# EAGLE board dac single ended 32-2 (EAGLE 4.13)
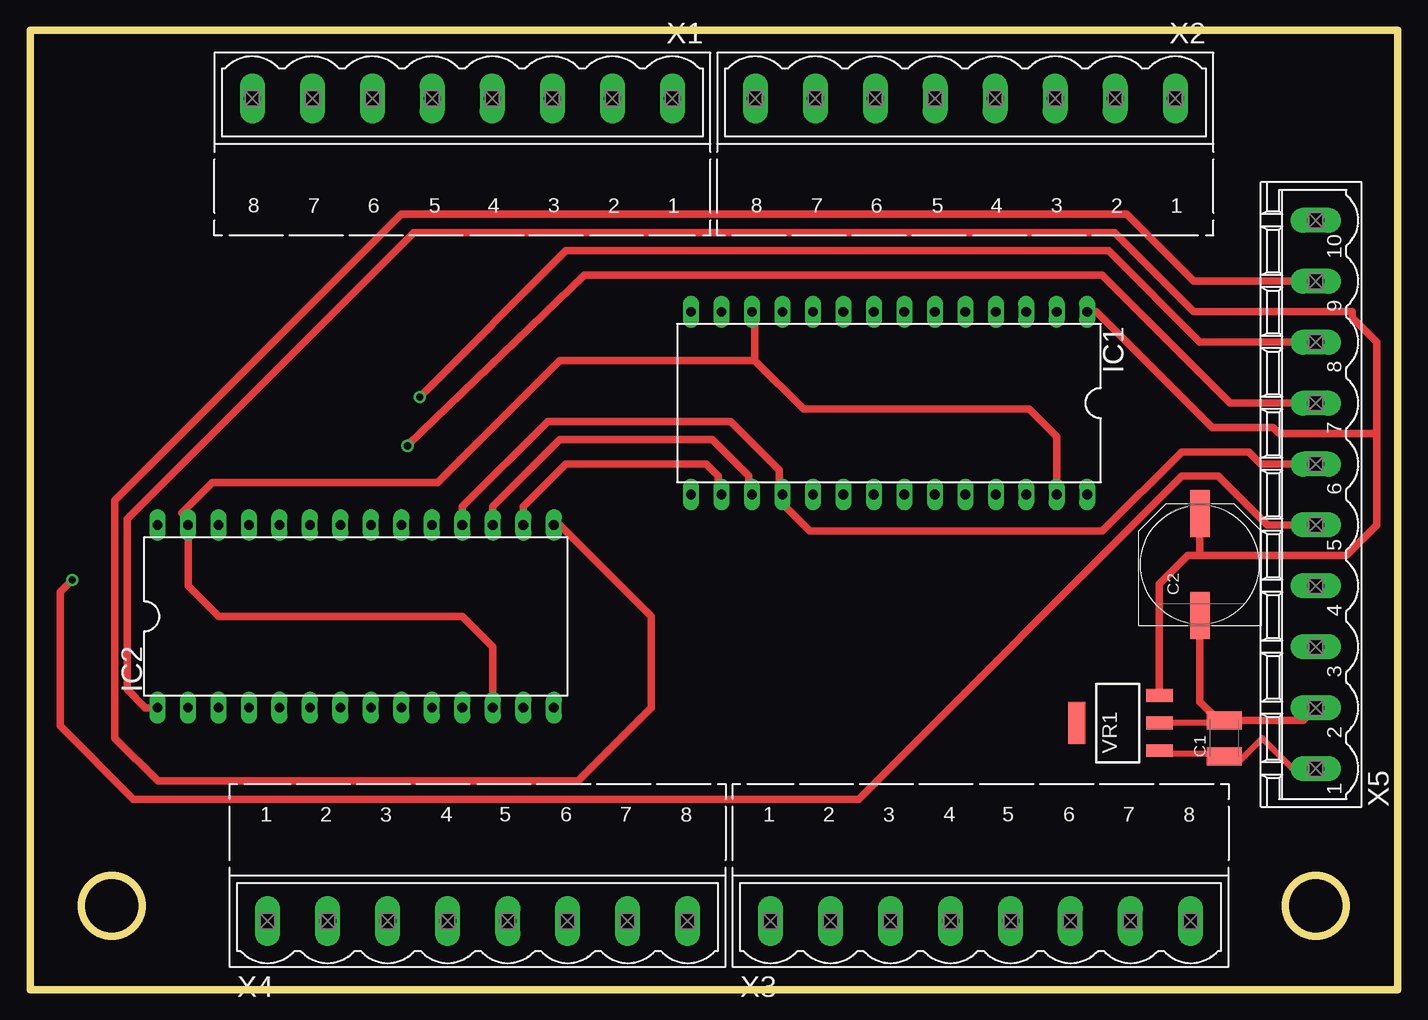
[diagram p0: board, top side]
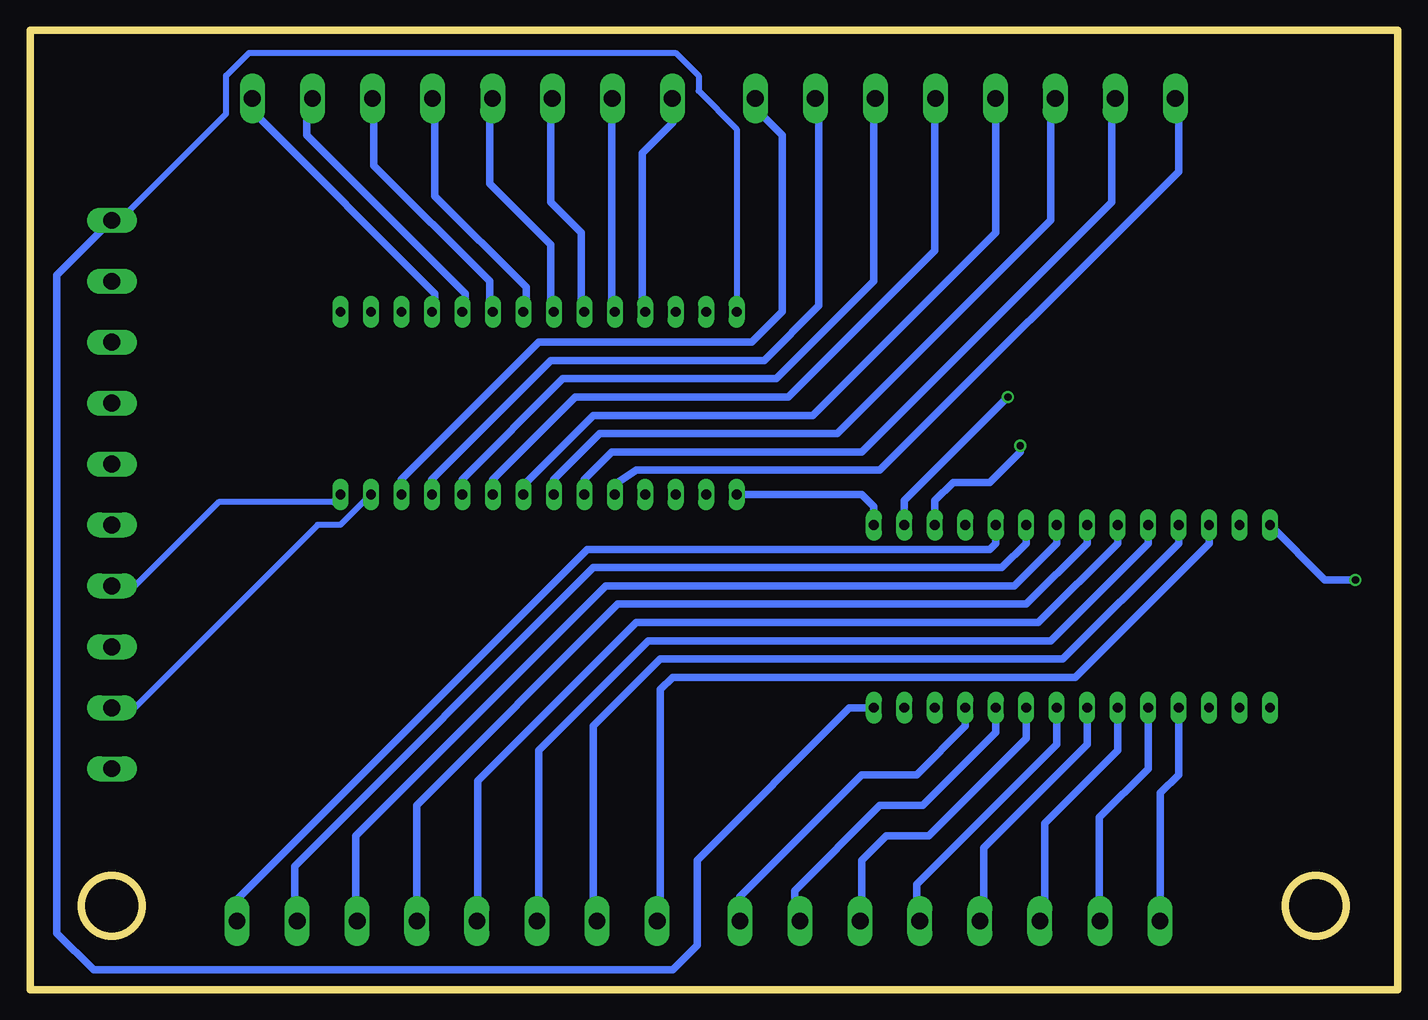
[diagram p1: board, bottom side, seen from below]

Size 113.97 x 80 mm. Coordinates in mm from the lower left corner, seen from the top.
Outline: 0,0 113.97,0 113.97,80 0,80 0,0
Outline: circle at 6.82,6.98 radius 2.54
Outline: circle at 107.15,6.98 radius 2.54
Copper layers (1*16): Top 0.035mm / dielectric 1.5mm / Bottom 0.035mm
Design rules "default": minimum track width 20mil, minimum drill 24mil, track to track 15mil, track to pad 15mil, pad to pad 15mil, via to via 15mil, smd to smd 8mil, copper to edge 40mil, drill to drill 8mil, minimum pad ring 10mil, minimum via ring 8mil, stop-mask expansion 4mil, vias tented up to drill 0mil, thermal gap 10mil

## Footprints (pad centres in the part's own frame; a part is rotated, then mirrored left to right if it is on the bottom)
C1210K = smd 1.5 x 2.9: 1 -1.5,0; 2 1.5,0
PANASONIC_G = smd 3.9 x 1.6: + 4.25,0; - -4.25,0
DIL28-6 = drill 0.813 long: 1 -16.51,-7.62; 2 -13.97,-7.62; 3 -11.43,-7.62; 4 -8.89,-7.62; 5 -6.35,-7.62; 6 -3.81,-7.62; 7 -1.27,-7.62; 8 1.27,-7.62; 9 3.81,-7.62; 10 6.35,-7.62; 11 8.89,-7.62; 12 11.43,-7.62; 13 13.97,-7.62; 14 16.51,-7.62; 15 16.51,7.62; 16 13.97,7.62; 17 11.43,7.62; 18 8.89,7.62; 19 6.35,7.62; 20 3.81,7.62; 21 1.27,7.62; 22 -1.27,7.62; 23 -3.81,7.62; 24 -6.35,7.62; 25 -8.89,7.62; 26 -11.43,7.62; 27 -13.97,7.62; 28 -16.51,7.62
SOT223R_INFINEON = smd 1.067 x 2.184: 1 -2.311,-3.479; 2 0,-3.48; 3 2.312,-3.48 | smd 3.5 x 1.4: 4 0,3.404
MSTBV8 = drill 1.397 long: 1 -17.501,0; 2 -12.497,0; 3 -7.493,0; 4 -2.489,0; 5 2.515,0; 6 7.493,0; 7 12.497,0; 8 17.501,0
MSTBV10 = drill 1.397 long: 1 -22.86,0; 2 -17.78,0; 3 -12.7,0; 4 -7.62,0; 5 -2.54,0; 6 2.54,0; 7 7.62,0; 8 12.7,0; 9 17.78,0; 10 22.86,0

## Placement (x,y rotation side)
C1  [C1210K]  99.53,20.95 90 top
C2  [PANASONIC_G]  97.5,35.43 90 top
IC1  DG406DJ  [DIL28-6]  71.59,48.89 180 top
IC2  DG406DJ  [DIL28-6]  27.14,31.11 0 top
VR1  VOLTAGE-REGULATORSO-223  [SOT223R_INFINEON]  90.64,22.22 90 top
X1  [MSTBV8]  36.03,74.29 180 top
X2  [MSTBV8]  77.94,74.29 180 top
X3  [MSTBV8]  79.21,5.71 0 top
X4  [MSTBV8]  37.3,5.71 0 top
X5  MSTBV10  [MSTBV10]  107.15,41.27 90 top

## Library data of the parts
C1 C2 VR1 = 1 Dan's Common Parts
IC1 IC2 = maxim
X1-X4 = con-phoenix-500
X5 = con-phoenix-508

## Nets
+5V: C2.+ IC1.1 IC2.1 VR1.3
+12V: C1.1 VR1.1 X5.1
GND: C1.2 C2.- IC1.12 IC1.27 IC2.12 IC2.27 VR1.2 X5.2
N$1: IC1.19 X1.8
N$2: IC1.20 X1.7
N$3: IC1.21 X1.6
N$4: IC1.22 X1.5
N$5: IC1.23 X1.4
N$6: IC1.24 X1.3
N$7: IC1.25 X1.2
N$8: IC1.26 X1.1
N$9: IC1.11 X2.8
N$10: IC1.10 X2.7
N$11: IC1.9 X2.6
N$12: IC1.8 X2.5
N$13: IC1.7 X2.4
N$14: IC1.6 X2.3
N$15: IC1.5 X2.2
N$16: IC1.4 X2.1
N$17: IC2.19 X3.8
N$18: IC2.20 X3.7
N$19: IC2.21 X3.6
N$20: IC2.22 X3.5
N$21: IC2.23 X3.4
N$22: IC2.24 X3.3
N$23: IC2.25 X3.2
N$24: IC2.26 X3.1
N$25: IC2.11 X4.8
N$26: IC2.10 X4.7
N$27: IC2.9 X4.6
N$28: IC2.8 X4.5
N$29: IC2.7 X4.4
N$30: IC2.6 X4.3
N$31: IC2.5 X4.2
N$32: IC2.4 X4.1
N$33: IC1.17 IC2.17 X5.7
N$34: IC1.16 IC2.16 X5.8
N$35: IC1.15 IC2.15 X5.9
N$36: IC1.14 IC2.14 X5.10
N$37: IC1.18 IC2.18 X5.6
N$38: IC1.28 X5.4
N$39: IC2.28 X5.5

## Tracks (layer width: path | path; a pad name or v marks a point on that pad's centre or on a via)
+5V
  Top 0.61: IC2.1 9.61,23.49 8.09,25.01 8.09,39.24 31.97,63.11 90.39,63.11 96.99,56.51 110.2,56.51 110.2,56 112.23,53.97 112.23,46.35 | 112.23,46.35 112.23,38.73 109.69,36.19 97.5,36.19 | IC1.1 88.86,56.51 98.51,46.86 103.59,46.86 104.1,46.35 112.23,46.35 | VR1.3 94.12,33.83 96.48,36.19 97.5,36.19 | 97.5,36.19 C2.+
+12V
  Top 0.508: VR1.1 95.08,19.68 98.26,19.68 C1.1 100.8,19.04 102.7,20.95 105.25,18.41 X5.1
GND
  Top 0.508: VR1.2 95.08,22.22 98.26,22.22 99.04,22.36 C1.2
  Top 0.61: IC2.12 38.57,28.57 36.03,31.11 15.71,31.11 13.17,33.65 IC2.27 13.17,39.24 12.66,39.75 15.2,42.29 34,42.29 44.16,52.45 60.41,52.45 | IC1.27 85.56,46.1 83.27,48.38 64.48,48.38 60.41,52.45 | IC1.12 60.41,56.51 60.41,52.45 | 99.04,22.36 99.04,22.45 97.5,24 C2.- | C1.2 106.11,22.45 X5.2
  Bottom 0.508: IC1.27 88.1,38.73 90,38.73 105.25,23.49 X5.2
N$1
  Bottom 0.61: IC1.19 64.99,41.52 64.99,42.29 63.46,43.3 43.14,43.3 18.25,68.19 18.25,74.29 X1.8
N$2
  Bottom 0.61: IC1.20 67.78,42.54 65.49,44.83 44.67,44.83 23.84,65.65 23.84,74.29 X1.7
N$3
  Bottom 0.61: IC1.21 70.32,42.54 66.51,46.35 46.7,46.35 28.92,64.13 28.92,74.29 X1.6
N$4
  Bottom 0.61: IC1.22 72.86,42.03 67.02,47.87 48.73,47.87 33.49,63.11 33.49,74.29 X1.5
N$5
  Bottom 0.508: 38.57,73.66 X1.4
  Bottom 0.61: IC1.23 75.4,42.54 68.54,49.4 50.76,49.4 38.57,61.59 38.57,73.66 38.57,73.78
N$6
  Bottom 0.61: IC1.24 77.94,42.54 69.56,50.92 51.78,50.92 43.65,59.05 43.65,74.29 X1.3
N$7
  Bottom 0.61: IC1.25 80.48,42.54 70.57,52.45 52.79,52.45 48.22,57.02 48.22,74.29 X1.2
N$8
  Bottom 0.61: IC1.26 83.02,42.54 71.59,53.97 53.81,53.97 51.27,56.51 51.27,71.24 53.81,73.78 53.81,74.29 X1.1
N$9
  Bottom 0.61: IC1.11 62.95,56.76 62.95,69.72 60.41,72.26 60.41,74.29 X2.8
N$10
  Bottom 0.61: IC1.10 65.49,56.76 65.49,74.29 | 65.49,74.29 X2.7 | 65.49,74.29 65.49,74.8
N$11
  Bottom 0.61: IC1.9 68.03,56.76 68.03,63.11 70.57,65.65 70.57,74.29 X2.6
N$12
  Bottom 0.61: IC1.8 70.57,56.76 70.57,62.1 75.65,67.18 75.65,74.29 | 75.65,74.29 X2.5 | 75.65,74.29 75.65,74.8
N$13
  Bottom 0.61: IC1.7 72.61,56.76 72.61,58.54 80.23,66.16 80.23,73.78 80.73,74.29 X2.4
N$14
  Bottom 0.61: IC1.6 75.65,56.76 75.65,59.05 85.31,68.7 85.31,74.29 X2.3
N$15
  Bottom 0.61: IC1.5 77.69,56.76 77.69,58.03 90.89,71.24 90.89,74.29 X2.2
N$16
  Bottom 0.61: IC1.4 80.23,56.76 80.23,58.03 94.96,72.77 94.96,74.29 X2.1
N$17
  Bottom 0.61: IC2.19 33.49,37.21 34,36.7 67.53,36.7 96.99,7.23 96.99,5.71 X3.8
N$18
  Bottom 0.61: IC2.20 30.95,37.21 32.98,35.17 67.02,35.17 91.91,10.28 91.91,5.71 X3.7
N$19
  Bottom 0.61: IC2.21 28.41,37.21 31.97,33.65 66,33.65 86.83,12.82 86.83,5.71 X3.6
N$20
  Bottom 0.61: IC2.22 25.87,37.21 30.95,32.13 64.99,32.13 81.75,15.36 81.75,5.71 X3.5
N$21
  Bottom 0.61: IC2.23 23.33,37.21 29.93,30.6 63.46,30.6 76.67,17.39 76.67,5.71 | 76.67,5.71 X3.4 | 76.67,5.71 76.67,5.2
N$22
  Bottom 0.61: IC2.24 20.79,37.21 28.92,29.08 62.45,29.08 71.59,19.93 71.59,5.71 X3.3
N$23
  Bottom 0.61: IC2.25 18.25,37.21 27.9,27.55 61.43,27.55 67.02,21.97 67.02,5.71 X3.2
N$24
  Bottom 0.61: IC2.26 15.71,37.21 26.89,26.03 60.41,26.03 61.43,25.01 61.43,6.22 61.94,5.71 X3.1
N$25
  Bottom 0.61: IC2.11 36.03,21.97 40.09,17.9 44.67,17.9 54.83,7.74 54.83,5.71 X4.8
N$26
  Bottom 0.61: IC2.10 33.49,21.46 39.59,15.36 43.14,15.36 50.25,8.25 50.25,5.71 X4.7
N$27
  Bottom 0.61: IC2.9 30.95,20.95 39.08,12.82 42.63,12.82 44.67,10.79 44.67,5.2 45.17,5.71 X4.6
N$28
  Bottom 0.61: IC2.8 28.41,20.44 40.09,8.76 40.09,5.71 X4.5
N$29
  Bottom 0.61: IC2.7 25.87,20.44 34.51,11.81 34.51,5.2 35.01,5.71 X4.4
N$30
  Bottom 0.61: IC2.6 23.33,19.93 29.43,13.84 29.43,5.71 X4.3
N$31
  Bottom 0.61: IC2.5 20.79,18.41 24.85,14.35 24.85,5.71 X4.2
N$32
  Bottom 0.61: IC2.4 18.25,17.9 19.77,16.38 19.77,5.71 X4.1
N$33  (via drill 0.6)
  Top 0.61: IC2.17 38.57,40.25 44.16,45.84 56.86,45.84 59.91,42.79 59.91,41.78 60.41,41.27 IC1.17 | X5.7 100.04,48.89 89.37,59.56 46.19,59.56 v31.46,45.33
  Bottom 0.61: v31.46,45.33 31.46,44.83 34,42.29 37.05,42.29 38.57,40.76 IC2.17
N$34  (via drill 0.6)
  Top 0.61: IC2.16 41.11,40.25 44.67,43.81 56.35,43.81 57.37,42.79 57.37,41.27 IC1.16 | X5.8 97.5,53.97 89.88,61.59 44.67,61.59 v32.47,49.4
  Bottom 0.61: v32.47,49.4 41.11,40.76 IC2.16
N$35
  Top 0.61: X5.9 96.99,59.05 91.4,64.64 30.95,64.64 7.07,40.76 7.07,20.95 10.63,17.39 45.68,17.39 51.78,23.49 51.78,31.11 43.65,39.24 IC2.15
  Bottom 0.61: IC2.15 43.65,40.25 44.67,41.27 IC1.15 55.33,41.27
N$36
  Bottom 0.508: IC1.14 55.08,71.75 58.25,74.92 58.25,76.19 60.16,78.1 95.72,78.1 97.62,76.19 97.62,73.02 105.88,64.77 X5.10
  Bottom 0.61: IC2.14 45.68,23.49 58.38,10.79 58.38,3.68 60.41,1.65 108.67,1.65 111.72,4.69 111.72,59.56 X5.10
N$37
  Top 0.61: IC2.18 36.03,40.25 43.14,47.37 58.38,47.37 62.45,43.3 62.45,41.27 | X5.6 102.58,43.81 101.56,44.83 95.97,44.83 89.37,38.22 64.99,38.22 62.45,40.76 62.45,41.27 | 62.45,41.27 IC1.18
N$38
  Bottom 0.508: IC1.28 88.73,40.64 98.26,40.64 105.25,33.65 X5.4
N$39  (via drill 0.6)
  Top 0.61: X5.5 103.09,38.73 99.02,42.79 95.97,42.79 69.05,15.87 8.6,15.87 2.5,21.97 2.5,33.14 v3.52,34.16
  Bottom 0.61: v3.52,34.16 6.06,34.16 IC2.28